# Altium PCB tang1.PcbDoc
Units mm, origin at the board's own origin, x right, y up, seen from the top; angles counter-clockwise.
Board outline 140.6 x 80.6 mm, 2 copper layers (Top Layer, Bottom Layer); 24 components, 29 nets, 142 pads, 0 vias.
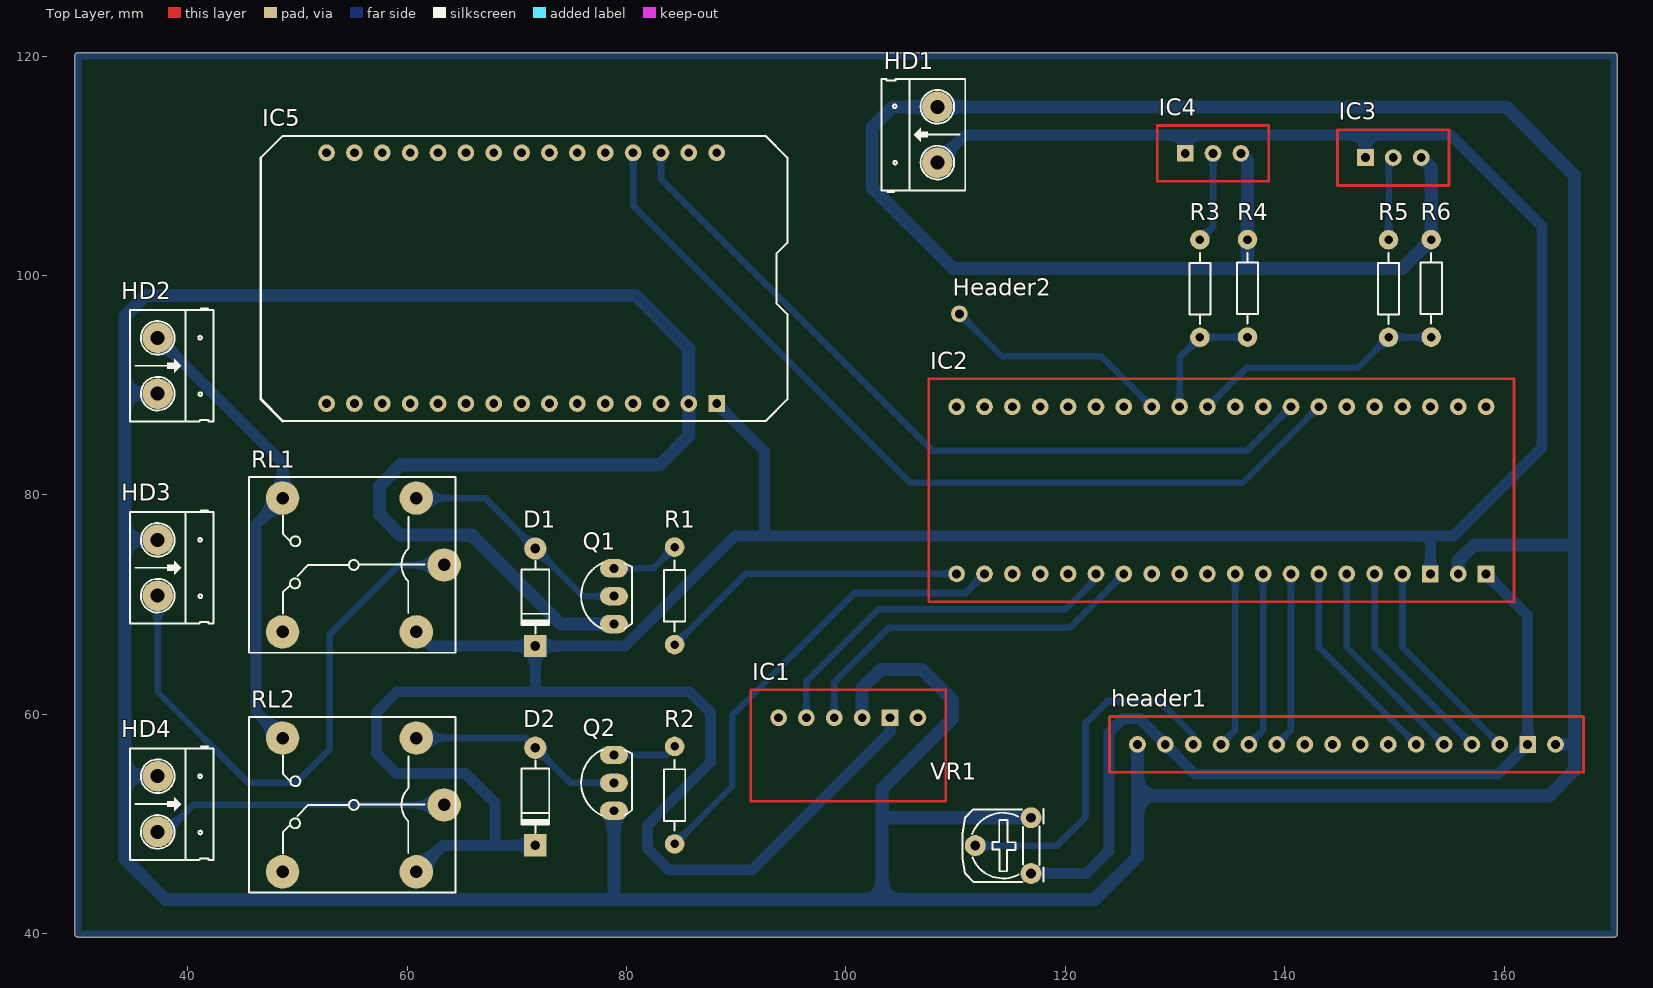
[diagram p0: Top Layer view]
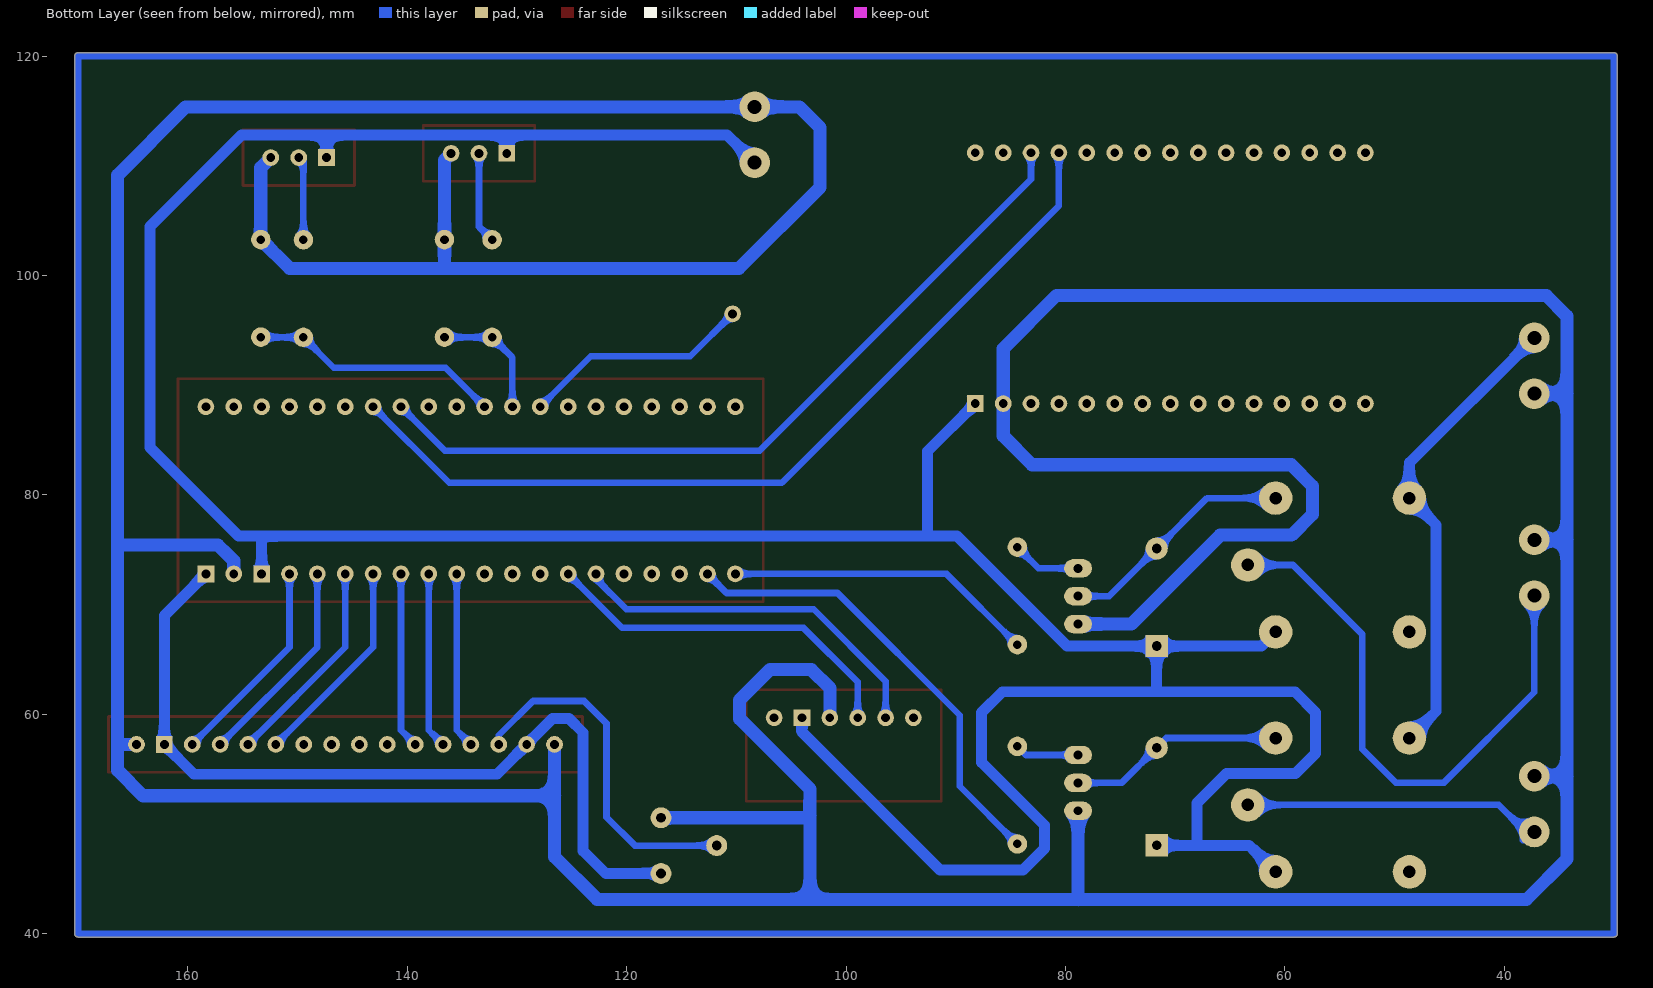
[diagram p1: Bottom Layer view, seen from below]
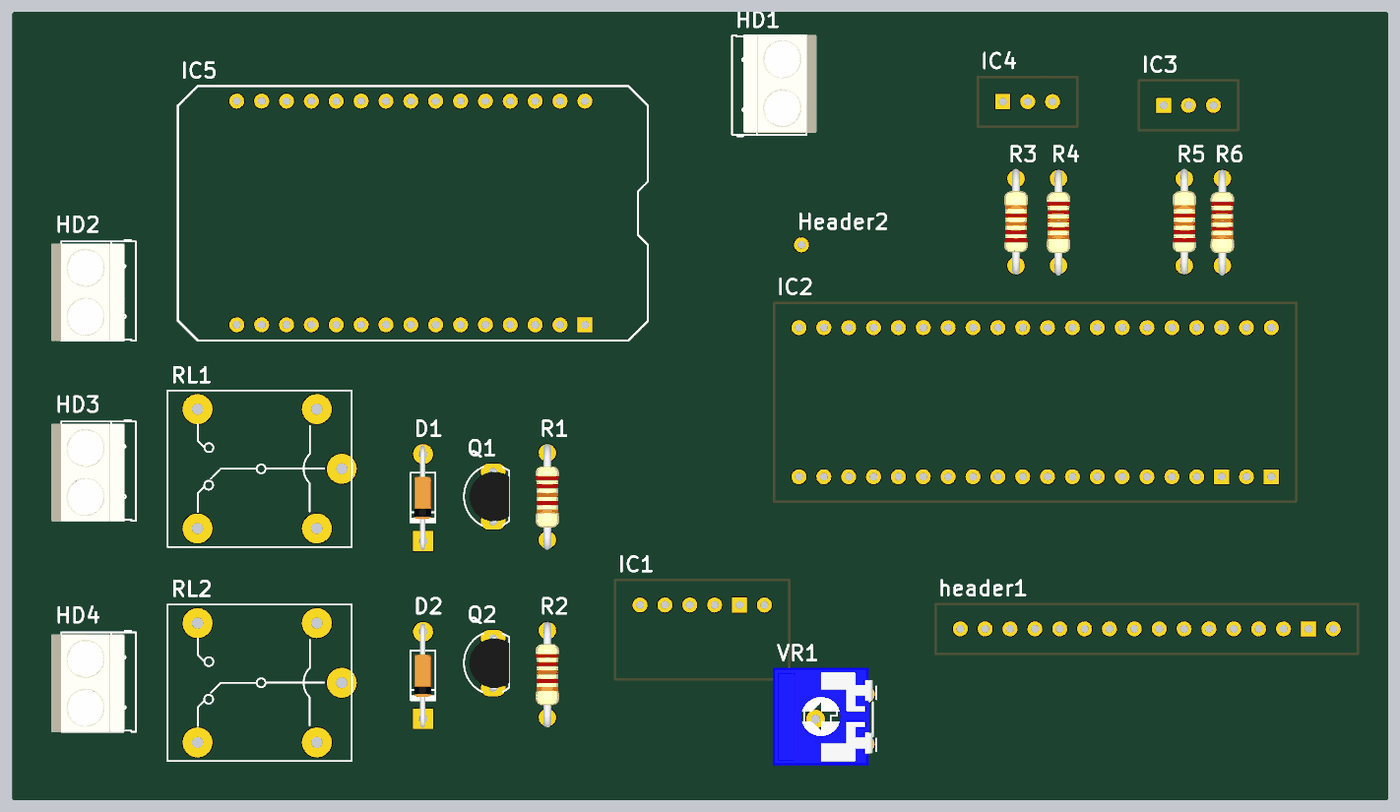
[diagram p2: 3D render of the assembled board from above, using the file's embedded part models]

## Layer stack, top to bottom
Top Solder: solder mask 0.0102, Solder Resist, Dk 3.5
Top Layer: signal copper 0.0356
Dielectric 1: dielectric 0.32, FR-4, Dk 4.8
Bottom Layer: signal copper 0.0356
Bottom Solder: solder mask 0.0102, Solder Resist, Dk 3.5

## Board outline
30,39.7 cw(c30,40) 29.7,40 29.7,120 cw(c30,120) 30,120.3 170,120.3 cw(c170,120) 170.3,120 170.3,40 cw(c170,40) 170,39.7

## Design rules (kind name [scope] priority, off if disabled: settings)
Clearance [All] p1: gap=0.4
PolygonConnect [All] p1: connectstyle=Relief reliefconductorwidth=0.254 reliefentries=4 polygonreliefangle="90 Angle" airgapwidth=0.254
RoutingLayers [All] p1: top layer_v5=FALSE bottom layer_v5=TRUE
RoutingVias [All] p1: holewidth=0.711 width=1.27 viastyle="Through Hole" minholewidth=0.711 minwidth=1.27 maxholewidth=0.711 maxwidth=1.27
SolderMaskExpansion [All] p1: expansion=0.102
Width NET [InNetClass('NET CLASS')] p1: maxlimit=0.6 minlimit=0.6 preferedwidth=0.6
Width GND [InNet('GND')] p2: maxlimit=1.2 minlimit=1.2 preferedwidth=1.2
Width 12V [InNet('12V')] p3: maxlimit=1 minlimit=1 preferedwidth=1
Width 3v3 [InNet('3V3')] p4: maxlimit=1 minlimit=1 preferedwidth=1
Width 5V [InNet('5V')] p5: maxlimit=1 minlimit=1 preferedwidth=1
29 further rules are at their usual default settings.

## Classes and differential pairs
net class "NET CLASS": NetD1_1 NetD2_1 NetHD3_2 NetHD4_2 Netheader1_3 NetHeader2_1 NetIC3_2 NetIC4_2 NetQ1_3 NetQ2_3 PA2 PA3 PA6 PA7 PA9 PA10 PB3 PB4 PB5 PB6 PB7 PB8 PB9 PB12 PB13

## Components (designator, comment, footprint, x,y, rotation, side; value= is the part's Value field where it differs from the comment)
D1 "1N4007" D1A 71.683,75.108 r90 top
D2 "1N4007" D1A 71.683,56.947 r90 top
HD1 "Header 2" HED2 108.331,110.287 r90 top
HD2 "Header 2" HED2 37.262,94.31 r270 top
HD3 "Header 2" HED2 37.262,75.895 r270 top
HD4 "Header 2" HED2 37.262,54.356 r270 top
header1 "HEADER16" header16_pin 126.568,57.252 r0 top
Header2 "jum1" PCBComponent_1#1 110.338,96.495 r90 top
IC1 "HC05" HC05_Pin 98.933,67.31 r270 top
IC2 "STM32F103" STM32 135.484,72.796 r0 top
IC3 "ACS712" PCBComponent_1#2 139.725,113.284 r0 top
IC4 "ACS712" PCBComponent_1#2 123.292,113.665 r0 top
IC5 "ESP8266" "ESP8266 V2" 52.654,88.722 r90 top
Q1 "C1815" QTO-92 78.845,70.764 r90 top
Q2 "C1815" QTO-92 78.845,53.746 r90 top
R1 "4k7" R1/4W 84.383,66.345 r90 top
R2 "4k7" R1/4W 84.383,48.184 r90 top
R3 "5k" R1/4W 132.258,103.251 r270 top
R4 "5k" R1/4W 136.601,94.376 r90 top
R5 "5k" R1/4W 149.454,103.251 r270 top
R6 "5k" R1/4W 153.34,94.376 r90 top
RL1 "Relay 10A/5V" RL_SPDT_10A 63.375,73.609 r180 top
RL2 "Relay 10A/5V" RL_SPDT_10A 63.375,51.74 r180 top
VR1 "10K" VR 116.865,45.491 r90 top

## Footprints (in the part's own frame and the unit in brackets; to place one, negate y for a bottom-side part, rotate by r counter-clockwise, add the part's x,y. Pads: shape width x height; smd on the part's side, far side on the other; paste and mask are expansions set on the pad)
D1A [mil] "Diode 1A, W 100mil, L 350mil"
  round 80 hole 35: 1(0,0)
  rect 80x80 hole 35: 2(-350,0)
  silkscreen extent -305,-50 -45,50, body extent -386,-33 34,36, height 84
"ESP8266 V2" [mm]
  round 1.524 hole 0.8: 1(-0.4,0) 2(-0.4,-2.54) 3(-0.4,-5.08) 4(-0.4,-7.62) 5(-0.4,-10.16) 6(-0.4,-12.7) 7(-0.4,-15.24) 8(-0.4,-17.78) 9(-0.4,-20.32) 10(-0.4,-22.86) 11(-0.4,-25.4) 12(-0.4,-27.94) 13(-0.4,-30.48) 14(-0.4,-33.02) 16(22.46,0) 17(22.46,-2.54) 18(22.46,-5.08) 19(22.46,-7.62) 20(22.46,-10.16) 21(22.46,-12.7) 22(22.46,-15.24) 23(22.46,-17.78) 24(22.46,-20.32) 25(22.46,-22.86) 26(22.46,-25.4) 27(22.46,-27.94) 28(22.46,-30.48) 29(22.46,-33.02) 30(22.46,-35.56)
  rect 1.524x1.524 hole 0.8: 15(-0.4,-35.56)
  silkscreen extent -2,-42 24,6
HC05_Pin [mil]
  round 60 hole 31.5: 1(300,300) 3(300,100) 4(300,0) 5(300,-100) 6(300,-200)
  rect 60x60 hole 31.5: 2(300,200)
  Top Layer lines w10: 600,-300 200,-300 200,400 600,400 600,-300
header16_pin [mil]
  round 60 hole 31.5: 1(0,0) 2(100,0) 3(200,0) 4(300,0) 5(400,0) 6(500,0) 7(600,0) 8(700,0) 9(800,0) 10(900,0) 11(1000,0) 12(1100,0) 13(1200,0) 14(1300,0) 16(1500,0)
  rect 60x60 hole 31.5: 15(1400,0)
  Top Layer lines w10: -100,-100 1600,-100 1600,100 -100,100 -100,-100
HED2 [mil] "Header 2, 2 pin, hight 300mil, Pin to Pin 200, Colour Green"
  round 110 hole 50: 1(0,0) 2(200,0)
  silkscreen extent -106,-100 300,200, body extent -92,-140 302,155, height 394
PCBComponent_1#1 [mil]
  round 60 hole 31.5: 1(0,0)
PCBComponent_1#2 [mil]
  rect 60x60 hole 31.5: 1(300,-100)
  round 60 hole 31.5: 2(400,-100) 3(500,-100)
  Top Layer lines w10: 200,-200 200,0 600,0 600,-200 200,-200
QTO-92 [mil] "TO-92"
  oval 66x100 hole 32: 1(-100,0) 2(0,0) 3(100,0)
  silkscreen extent -117,-65 120,118, body extent -109,-66 109,95, height 245
R1/4W [mil] "R 1/4W, 2 Pin, 350mil"
  round 70 hole 31: 1(0,0) 2(350,0)
  silkscreen extent 48,-38 302,38, body extent -40,-47 386,47, height 111
RL_SPDT_10A [mil] "Relay SPDT, 5 pin, 10A,W 650mil, L 800mil, H 800mil"
  round 120 hole 45: 1(0,0) 2(580,240) 3(580,-240) 4(100,-240) 5(100,240)
  silkscreen extent -40,-315 700,315
STM32 [mil]
  round 60 hole 31.5: 1(-1000,600) 2(-900,600) 3(-800,600) 4(-700,600) 5(-600,600) 6(-500,600) 7(-400,600) 8(-300,600) 9(-200,600) 10(-100,600) 11(0,600) 12(100,600) 13(200,600) 14(300,600) 15(400,600) 16(500,600) 17(600,600) 18(700,600) 19(800,600) 20(900,600) 21(-1000,0) 22(-900,0) 23(-800,0) 24(-700,0) 25(-600,0) 26(-500,0) 27(-400,0) 28(-300,0) 29(-200,0) 30(-100,0) 31(0,0) 32(100,0) 33(200,0) 34(300,0) 35(400,0) 36(500,0) 37(600,0) 39(800,0)
  rect 60x60 hole 31.5: 38(700,0) 40(900,0)
  Top Layer lines w10: -1100,-100 -1100,700 1000,700 1000,-100 -1100,-100
VR [mil] "Resistor Variable"
  round 75 hole 35: 1(0,0) 2(100,200) 3(200,0)
  silkscreen extent -31,-44 231,246, body extent -87,-30 307,372, height 165

## Part data
D1 D2: library part D1A, "Diode 1A"
HD1 HD2 HD3 HD4: library part Hed2, "Header 2 (Green)"
IC5: library part ESP8266_V2
Q1 Q2: "NPN 600mW, ECB"
R1 R2 R3 R4 R5 R6: library part R1/4W, "Resistor 1/4W"
RL1 RL2: library part "Relay 1", "Relay SPDT,10A - 12VDC 5 Pin"
VR1: library part VR, "Var Resistor"

## Nets (pads, with @x,y where several pads share a name; then routed paths per layer and width w, separated by ;. In a path a pad name is that pad's centre, name@x,y a point inside that pad or via, vN(x,y) a via of type N, cw(c..) or ccw(c..) an arc to the next point about the centre after c; other vN are vias at no path point)
3V3: header1.2 header1.15 IC2.40 VR1.1 | length 77.8
  Bottom Layer w1: VR1.1 121.895,45.491 123.952,47.549 123.952,58.318 125.241,59.608 126.752,59.608 header1.2 131.826,54.534 159.41,54.534 header1.15 162.128,69.012 IC2.40
5V: D1.2 D2.2 HD1.1 IC1.2 IC2.38 IC3.1 IC4.1 IC5.15 RL1.5 RL2.5 | length 324
  Bottom Layer w1: RL2.5 63.248,48.057 67.92,48.057 ; RL1.5 62.131,66.218 D1.2 ; D2.2 67.92,48.057 ; IC5.15 92.561,83.975 92.561,76.369 ; IC1.2 104.013,58.369 91.44,45.796 83.871,45.796 81.915,47.752 81.915,49.886 87.655,55.626 87.655,60.147 85.748,62.055 71.603,62.055 ; HD1.1 110.831,112.787 130.912,112.787 ; IC4.1 130.912,112.787 ; IC3.1 147.345,112.787 ; IC2.38 153.264,75.971 152.997,76.238 ; 67.92,48.057 68.008,48.146 68.008,51.93 65.329,54.61 59.03,54.61 57.201,56.439 57.201,60.173 59.083,62.055 71.603,62.055 ; 71.603,62.055 71.683,62.135 D1.2 ; D1.2 79.858,66.218 89.878,76.238 152.997,76.238 ; 130.912,112.787 147.345,112.787 ; 147.345,112.787 155.107,112.787 163.424,104.47 163.424,84.303 155.359,76.238 152.997,76.238
12V: HD2.1 RL1.3 RL2.3 | length 43.2
  Bottom Layer w1: HD2.1 48.643,82.929 RL1.3 46.203,77.265 46.203,60.276 RL2.3
GND: HD1.2 HD2.2 HD3.1 HD4.1 header1.1 header1.16 IC1.3 IC2.39 IC3.3 IC4.3 IC5.14 Q1.1 Q2.1 R4.2 R6.2 VR1.3 | length 595.6
  Bottom Layer w1.2: HD4.1 34.29,54.356 ; HD3.1 34.29,75.895 ; HD2.2 34.29,89.23 ; Q2.1 78.845,43.149 78.816,43.12 ; Q1.1 73.99,68.224 65.888,76.327 59.385,76.327 57.48,78.232 57.48,80.797 59.423,82.74 83.045,82.74 85.674,85.369 IC5.14 85.674,93.32 80.823,98.171 36.17,98.171 34.29,96.291 34.29,89.23 ; IC1.3 101.473,62.398 103.154,64.079 106.939,64.079 109.703,61.316 109.703,59.588 103.276,53.162 103.276,50.749 ; VR1.3 103.454,50.571 103.276,50.749 ; header1.1 126.568,52.578 ; IC4.3 136.601,110.515 R4.2 136.601,100.762 136.728,100.635 ; IC3.3 153.34,109.83 R6.2 150.708,100.635 136.728,100.635 ; IC2.39 155.804,74 156.362,74.558 156.372,74.558 157.239,75.425 166.357,75.425 166.395,75.387 ; header1.16 166.116,57.252 166.395,57.531 ; 34.29,54.356 34.29,46.803 37.973,43.12 78.816,43.12 ; 34.29,54.356 34.29,75.895 ; 34.29,75.895 34.29,89.23 ; 78.816,43.12 101.549,43.12 101.559,43.129 103.276,43.129 ; 103.276,43.129 103.276,50.749 ; 103.276,43.129 122.682,43.129 126.568,47.015 126.568,52.578 ; 126.568,52.578 164.084,52.578 166.395,54.889 166.395,57.531 ; 136.728,100.635 109.753,100.635 102.362,108.026 102.362,113.462 104.267,115.367 HD1.2 160.172,115.367 166.395,109.144 166.395,75.387 ; 166.395,57.531 166.395,75.387
NetD1_1: D1.1 Q1.2 RL1.4 | length 21.7
  Bottom Layer w0.6: RL1.4 67.085,79.705 D1.1 76.026,70.764 Q1.2
NetD2_1: D2.1 Q2.2 RL2.4 | length 19.7
  Bottom Layer w0.6: RL2.4 70.794,57.836 D2.1 74.883,53.746 Q2.2
NetHD3_2: HD3.2 RL1.1 | length 52.7
  Bottom Layer w0.6: HD3.2 37.262,62.001 45.491,53.772 49.886,53.772 52.934,56.82 52.934,67.285 59.258,73.609 RL1.1
NetHD4_2: HD4.2 RL2.1 | length 28.1
  Bottom Layer w0.6: HD4.2@37.262,48.505 38.313,48.505 38.313,49.555 40.497,51.74 RL2.1
Netheader1_3: header1.3 VR1.2 | length 32.5
  Bottom Layer w0.6: VR1.2 119.236,48.031 121.827,50.622 121.827,59.165 123.876,61.214 128.524,61.214 131.648,58.09 header1.3
NetHeader2_1: Header2.1 IC2.8 | length 21
  Bottom Layer w0.6: Header2.1 114.198,92.634 123.266,92.634 IC2.8
NetIC3_2: IC3.2 R5.1 | length 7.7
  Bottom Layer w0.6: R5.1 149.454,110.312 IC3.2
NetIC4_2: IC4.2 R3.1 | length 8.4
  Bottom Layer w0.6: R3.1 133.452,104.445 IC4.2
NetQ1_3: Q1.3 R1.2 | length 6.3
  Bottom Layer w0.6: Q1.3 82.452,73.304 R1.2
NetQ2_3: Q2.3 R2.2 | length 5.9
  Bottom Layer w0.6: Q2.3 83.595,56.286 R2.2
PA2: IC2.14 IC5.27 | length 80.7
  Bottom Layer w0.6: IC5.27 80.594,106.35 105.842,81.102 136.169,81.102 IC2.14
PA3: IC2.13 IC5.28 | length 71.8
  Bottom Layer w0.6: IC5.28 83.134,108.763 107.874,84.023 136.55,84.023 IC2.13
PA6: IC2.10 R5.2 R6.1 | length 23
  Bottom Layer w0.6: IC2.10 136.5,91.592 146.685,91.592 R5.2 153.325,94.361 R6.1
PA7: IC2.9 R3.2 R4.1 | length 11.4
  Bottom Layer w0.6: IC2.9 130.404,92.507 R3.2 136.586,94.361 R4.1
PA9: IC1.5 IC2.26 | length 34
  Bottom Layer w0.6: IC1.5 96.393,63.017 102.946,69.571 120.015,69.571 122.784,72.339 IC2.26
PA10: IC1.4 IC2.27 | length 33.7
  Bottom Layer w0.6: IC1.4 98.933,62.941 103.861,67.869 120.396,67.869 IC2.27
PB3: header1.4 IC2.31 | length 16.1
  Bottom Layer w0.6: header1.4 135.484,58.547 IC2.31
PB4: header1.5 IC2.32 | length 16.1
  Bottom Layer w0.6: header1.5 138.024,58.547 IC2.32
PB5: header1.6 IC2.33 | length 16.1
  Bottom Layer w0.6: header1.6 140.564,58.547 IC2.33
PB6: header1.11 IC2.34 | length 19.2
  Bottom Layer w0.6: IC2.34 143.104,66.116 header1.11
PB7: header1.12 IC2.35 | length 19.2
  Bottom Layer w0.6: IC2.35 145.644,66.116 header1.12
PB8: header1.13 IC2.36 | length 19.2
  Bottom Layer w0.6: IC2.36 148.184,66.116 header1.13
PB9: header1.14 IC2.37 | length 19.2
  Bottom Layer w0.6: IC2.37 150.724,66.116 header1.14
PB12: IC2.21 R1.1 | length 28.4
  Bottom Layer w0.6: R1.1 90.834,72.796 IC2.21
PB13: IC2.22 R2.1 | length 42.2
  Bottom Layer w0.6: R2.1 89.637,53.438 89.637,59.919 100.774,71.056 110.884,71.056 IC2.22
pads on no net: header1.7 header1.8 header1.9 header1.10 IC1.1 IC1.6 IC2.1 IC2.2 IC2.3 IC2.4 IC2.5 IC2.6 IC2.7 IC2.11 IC2.12 IC2.15 IC2.16 IC2.17 IC2.18 IC2.19 IC2.20 IC2.23 IC2.24 IC2.25 IC2.28 IC2.29 IC2.30 IC5.1 IC5.2 IC5.3 IC5.4 IC5.5 IC5.6 IC5.7 IC5.8 IC5.9 IC5.10 IC5.11 IC5.12 IC5.13 IC5.16 IC5.17 IC5.18 IC5.19 IC5.20 IC5.21 IC5.22 IC5.23 IC5.24 IC5.25 IC5.26 IC5.29 IC5.30 RL1.2 RL2.2
copper on no net: | length 440
  Bottom Layer w0.6: 30,40 170,40 170,120 30,120 30,40